# Altium PCB HandChip.PcbDoc
Units mil, origin at the board's own origin, x right, y up, seen from the top; angles counter-clockwise.
Board outline 3000 x 2000 mil, 2 copper layers (Top Layer, Bottom Layer); 39 components, 27 nets, 139 pads, 72 vias.
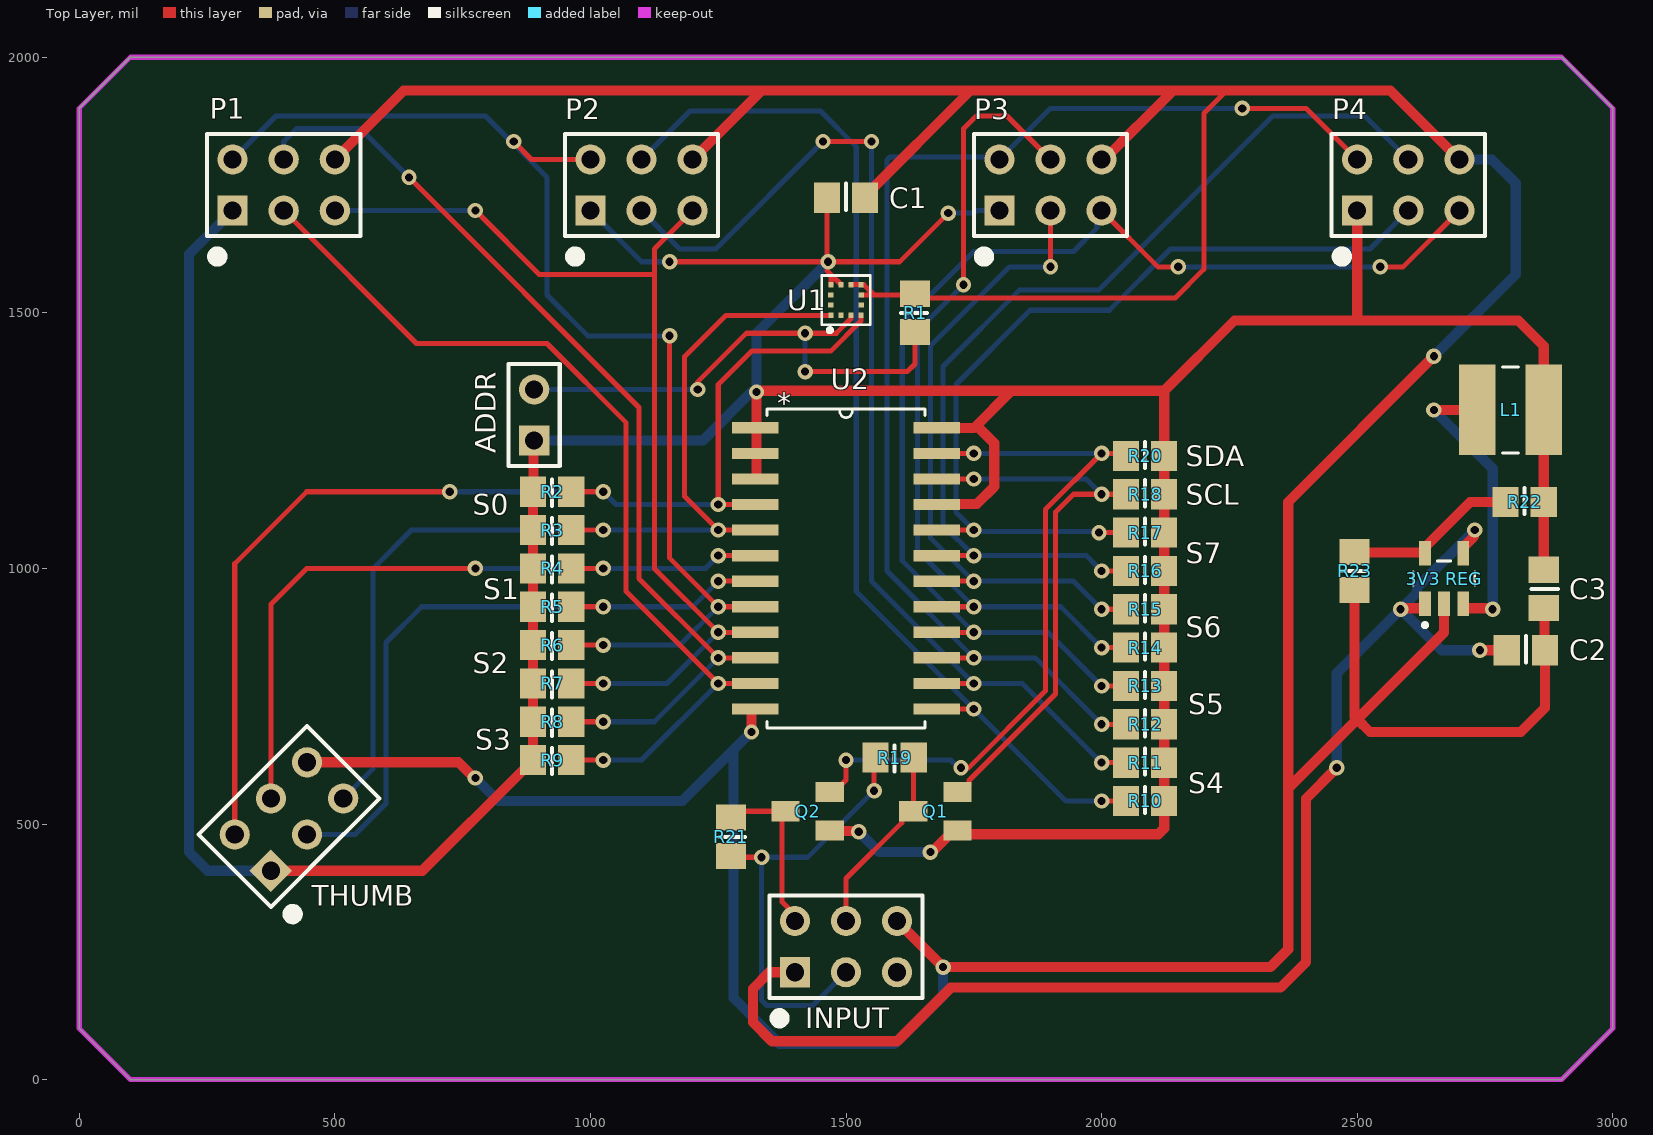
[diagram p0: Top Layer view]
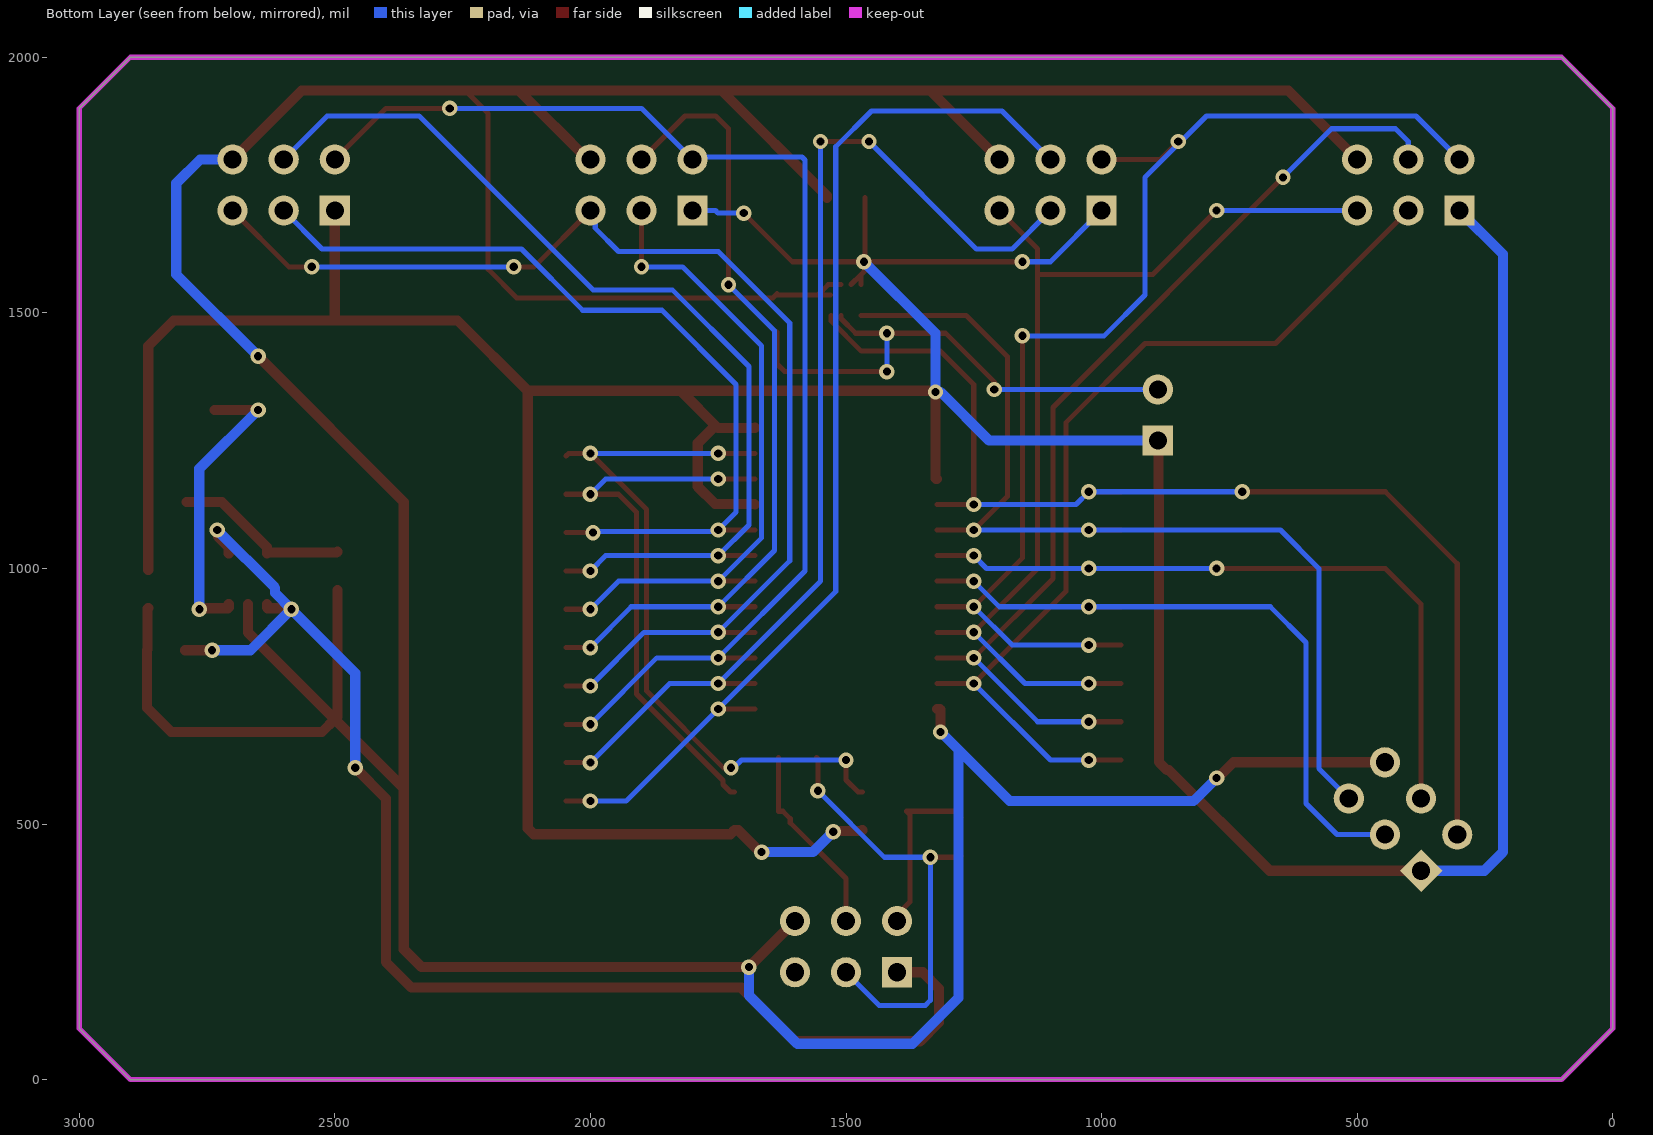
[diagram p1: Bottom Layer view, seen from below]
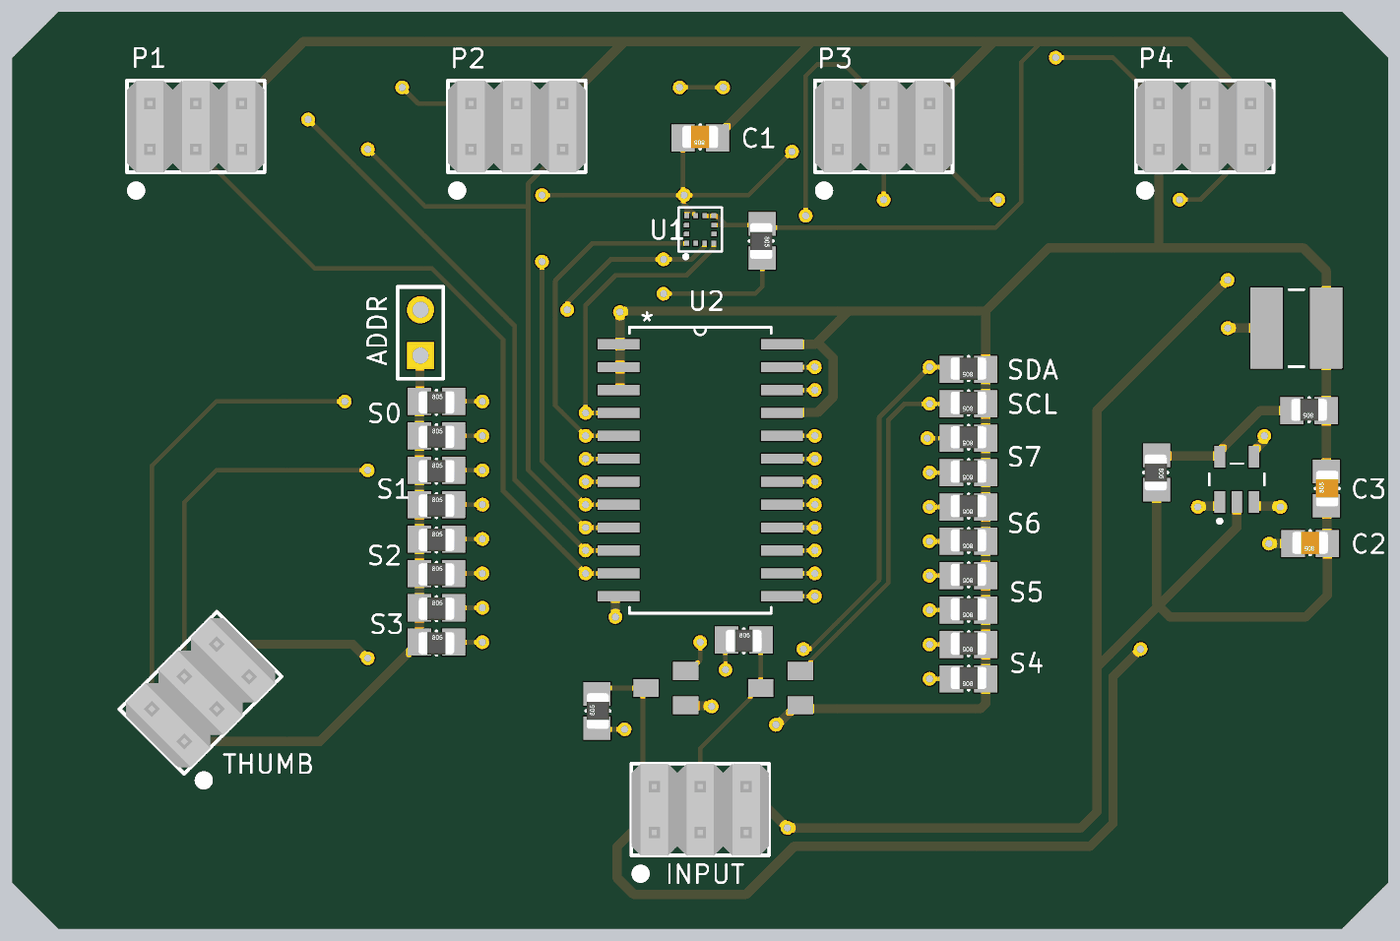
[diagram p2: 3D render of the assembled board from above, using the file's embedded part models]

## Layer stack, top to bottom
Top Solder: solder mask 0.4, Solder Resist, Dk 3.5
Top Layer: signal copper 1.4
Dielectric 1: dielectric 12.6, FR-4, Dk 4.8
Bottom Layer: signal copper 1.4
Bottom Solder: solder mask 0.4, Solder Resist, Dk 3.5

## Board outline
100,0 0,100 0,1900 100,2000 2900,2000 3000,1900 3000,100 2900,0

## Design rules (kind name [scope] priority, off if disabled: settings)
Clearance "Clearance~Sunstone Circuits" [All] p1: gap=6 ignorepadtopadclearanceinfootprint=FALSE except(0: Arc-Hole Track-Hole SMDPad-Hole THPad-Hole Via-Hole Fill-Hole Poly-Hole Region-Hole Text-Hole) // Sunstone Circuits Minimum Clearance Rule (Double Sided)
HoleSize "HoleSize~Sunstone Circuits" [All] p1: absolutevalues=TRUE maxlimit=251 minlimit=16 maxpercent=80.000 minpercent=20.000 // SSC Hole Size Rule For Single Sided & Double Sided Designs.
HoleSize Testpoint [All] p2: absolutevalues=TRUE maxlimit=100 minlimit=1 maxpercent=80.000 minpercent=20.000
HoleSize TestPointUsage [All] p3: absolutevalues=TRUE maxlimit=100 minlimit=1 maxpercent=80.000 minpercent=20.000
MinimumAnnularRing "MinimumAnnularRing~Sunstone Circuits" [All] p1: minimumring=7 // Sunstone Circuits Minimum Annular Ring (Double Sided)
MinimumSolderMaskSliver [All] p1: minsoldermaskwidth=2
PlaneClearance "PlaneClearance~Sunstone Circuits" [All] p1: clearance=12 // Sunstone Circuits Power Plane Clearance Rule (Double Sided)
PlaneConnect "PlaneConnect~Sunstone Circuits" [All] p1: planeconnectstyle=Relief reliefexpansion=10 reliefentries=4 reliefconductorwidth=8 reliefairgap=10 // Sunstone Circuits Power Plane Connect Rule (Double Sided)
PolygonConnect "PolygonConnect~Sunstone Circuits" [All] p1: connectstyle=Relief reliefconductorwidth=8 reliefentries=4 polygonreliefangle="90 Angle" airgapwidth=10 // Sunstone Circuits Polygon Connect Style (Double Sided)
RoutingVias "RoutingVias~Sunstone Circuits" [All] p1: holewidth=16 width=30 viastyle="Through Hole" minholewidth=16 minwidth=30 maxholewidth=20 maxwidth=40 // Sunstone Circuits Routing Vias Rule (Double Sided)
ShortCircuit "ShortCircuit~Sunstone Circuits" [All] p1: allowed=FALSE // Sunstone Circuits Short Circuit Rule~Do Not Allow (Double Sided)
SilkToSilkClearance [All] p1: silktosilkclearance=1
SilkToSolderMaskClearance [IsPad] p1: minsilkscreentomaskgap=3 clearancetoexposedcopper=TRUE
SolderMaskExpansion "SolderMaskExpansion~Sunstone Circuits" [All] p1: expansion=3 // Sunstone Circuits Solder Mask Expansion Rule (Double Sided)
ViasUnderSMD "ViasUnderSMD~Sunstone Circuits" [All] p1: allowed=FALSE // Sunstone Circuits Vias Under SMD~Do Not Allow (Double Sided)
Width "Width~Sunstone Circuits" [All] p1: maxlimit=100 minlimit=6 preferedwidth=10 // Sunstone Circuits Minimum Width Rule (Double Sided)
23 further rules are at their usual default settings.

## Components (designator, comment, footprint, x,y, rotation, side; value= is the part's Value field where it differs from the comment)
"3V3 REG" "TLV62568DBVR" *SOT95P280X145-5N 2670,980 r0 top
ADDR "90120-0122" HDR1X2 890,1250 r90 top
C1 ".1uF" 0805-CAP 1500,1725 r180 top
C2 "Cap" 0805-CAP 2830,840 r180 top
C3 "Cap" 0805-CAP 2865,960 r90 top
INPUT "90131-0123" HDR2X3 1400,210 r0 top
L1 "SDR0403-2R2ML" *SDR0403 2800,1310 r0 top
P1 "90131-0123" HDR2X3 300,1700 r0 top
P2 "90131-0123" HDR2X3 1000,1700 r0 top
P3 "90131-0123" HDR2X3 1800,1700 r0 top
P4 "90131-0123" HDR2X3 2500,1700 r0 top
Q1 "BSS138" *BSS138_BSS138(Primary) 1675,525 r90 top
Q2 "BSS138" *BSS138_BSS138(Primary) 1425,525 r90 top
R1 "10k" 0805-RES 1635,1500 r270 top
R2 "2.4k" 0805-RES 925,1150 r0 top
R3 "2.4k" 0805-RES 925,1075 r0 top
R4 "2.4k" 0805-RES 925,1000 r0 top
R5 "2.4k" 0805-RES 925,925 r0 top
R6 "2.4k" 0805-RES 925,850 r0 top
R7 "2.4k" 0805-RES 925,775 r0 top
R8 "2.4k" 0805-RES 925,700 r0 top
R9 "2.4k" 0805-RES 925,625 r0 top
R10 "2.4k" 0805-RES 2085,545 r180 top
R11 "2.4k" 0805-RES 2085,620 r180 top
R12 "2.4k" 0805-RES 2085,695 r180 top
R13 "2.4k" 0805-RES 2085,770 r180 top
R14 "2.4k" 0805-RES 2085,845 r180 top
R15 "2.4k" 0805-RES 2085,920 r180 top
R16 "2.4k" 0805-RES 2085,995 r180 top
R17 "2.4k" 0805-RES 2085,1070 r180 top
R18 "2.4k" 0805-RES 2085,1145 r180 top
R19 "2.4k" 0805-RES 1595,630 r0 top
R20 "2.4k" 0805-RES 2085,1220 r180 top
R21 "2.4k" 0805-RES 1275,475 r90 top
R22 "2.4k" 0805-RES 2827.6,1130 r180 top
R23 "2.4k" 0805-RES 2495,995 r270 top
THUMB "90131-0123" HDR2X3 375,408.58 r45 top
U1 "KX003-1077" *XDCR_KX003-1077 1500,1525 r90 top
U2 "PCA9548ADWR" DW24 1500,1000 r0 top

## Footprints (in the part's own frame and the unit in brackets; to place one, negate y for a bottom-side part, rotate by r counter-clockwise, add the part's x,y. Pads: shape width x height; smd on the part's side, far side on the other; paste and mask are expansions set on the pad)
0805-CAP [mm]
  rect 1.3x1.5 smd: 1(-0.95,0) 2(0.95,0)
  silkscreen extent 0,-0.7 0,0.6, body extent -1,-0.68 1,0.57, height 0.78
0805-RES [mm]
  rect 1.3x1.5 smd: 1(-0.95,0) 2(0.95,0)
  silkscreen extent 0,-0.7 0,0.6, body extent -1,-0.68 1,0.57, height 0.78
*BSS138_BSS138(Primary) [mm]
  rect 1x1.4 smd: D(0,1.1) G(-0.95,-1.1) S(0.95,-1.1)
*SDR0403 [mil]
  rect 71x177 smd: 1(-65,0) 2(65,0)
  silkscreen extent -16,-84 16,84
*SOT95P280X145-5N [mm]
  rect 0.59x1.21 smd: 1(-0.95,-1.255) 2(0,-1.255) 3(0.95,-1.255) 4(0.95,1.255) 5(-0.95,1.255)
  silkscreen extent -1.53,-2.41 1.53,0.87
*XDCR_KX003-1077 [mm]
  rect 0.275x0.25 smd: 1(-0.763,0.75) 2(-0.763,0.25) 3(-0.763,-0.25) 4(-0.763,-0.75) 7(0.763,-0.75) 8(0.763,-0.25) 9(0.763,0.25) 10(0.763,0.75)
  rect 0.25x0.275 smd: 5(-0.25,-0.763) 6(0.25,-0.763) 11(0.25,0.763) 12(-0.25,0.763)
  silkscreen extent -1.6,-1.2 1.22,1.2
DW24 [mil]
  rect 91x22 smd: 1(-178,275) 2(-178,225) 3(-178,175) 4(-178,125) 5(-178,75) 6(-178,25) 7(-178,-25) 8(-178,-75) 9(-178,-125) 10(-178,-175) 11(-178,-225) 12(-178,-275) 13(178,-275) 14(178,-225) 15(178,-175) 16(178,-125) 17(178,-75) 18(178,-25) 19(178,25) 20(178,75) 21(178,125) 22(178,175) 23(178,225) 24(178,275)
  silkscreen extent -154,-312 154,312
HDR1X2 [mm] "Connector; Header; 2 Position"
  rect 1.5x1.5 hole 0.9: 1(0,0)
  round 1.5 hole 0.9: 2(2.54,0)
  silkscreen extent -1.27,-1.27 3.81,1.27
HDR2X3 [mm] "Connector; Header; 3x2 Position"
  rect 1.5x1.5 hole 0.9: 1(0,0)
  round 1.5 hole 0.9: 2(0,2.54) 3(2.54,0) 4(2.54,2.54) 5(5.08,0) 6(5.08,2.54)
  silkscreen extent -1.27,-2.54 6.35,3.81, body extent -1.27,-1.27 6.35,3.81, height 8.42

## Part data
ADDR: "MOLEX CONN HEADER 2POS .100\" STR TIN", Manufacturer 1=Molex, Supplier Part Number 1=WM8072-ND, GFUPartNo=90120-0122, Manufacturer Part Number 1=90120-0122, Part Type=THRU, Supplier 1=Digi-Key
C1: library part Cap, "Capacitor"
C2 C3: "Capacitor"
INPUT P1 P2 P3 P4 THUMB: "MOLEX CONN HEADER 6POS 2ROW .100\" STR TIN", Manufacturer 1=Molex, Supplier Part Number 1=WM8121-ND, GFUPartNo=90131-0123, Manufacturer Part Number 1=90131-0123, Part Type=THRU, Supplier 1=Digi-Key
L1: "2.2µH Unshielded Wirewound Inductor 2.6A 47mOhm Max Nonstandard", Package="Nonstandard Bourns", Availability=Unavailable, digikey_Link=https://www.digikey.com/product-detail/en/bourns-inc/SDR0403-2R2ML/SDR0403-2R2MLCT-ND/2127089, MF=Bourns, MP=SDR0403-2R2ML, Price=None
Q1 Q2: "N-Channel 50V 220mA _Ta_ 360mW _Ta_ Surface Mount Die", Package="SOT-23 Fairchild Semiconductor", Availability=Unavailable, MF="MICROSS/On Semiconductor", MP=BSS138, Price=None, SnapEDA_Link=https://www.snapeda.com/parts/BSS138/MICROSS/On%20Semiconductor/view-part/215/?ref=snap
R1 R2 R3 R4 R5 R6 R7 R8 R9 R10 R11 R12 R13 R14 R15 R16 R17 R18 R19 R20 R21 R22 R23: library part ResBasic, "Resistor"
U1: "Accelerometer X, Y, Z Axis ±2g, 4g, 8g, 16g 3.5kHz _X,Y_, 1.8kHz _Z_ 12-LGA _2x2_", Package="VFLGA-12 Rohm Semiconductor", Digi-Key_Part_Number=KX003-1077CT-ND, Digi-Key_Purchase_URL=https://www.digikey.com/product-detail/en/rohm-semiconductor/KX003-1077/KX003-1077CT-ND/9679234?utm_source=snapeda&utm_medium=aggregator&utm_campaign=symbol, MF="Rohm Semiconductor", MP=KX003-1077, SnapEDA_Link=https://www.snapeda.com/parts/KX003-1077/Rohm/view-part/3603894/?ref=snap
U2: Manufacturer="Texas Instruments", Built_By=EMA_UL_Team, C="Copyright (C) 2015 Accelerated Designs. All rights reserved", Manufacturer_Part_Number=PCA9548ADWR, Vendor="Texas Instruments"

## Via types
v1: diameter 30, hole 16, Top Layer to Bottom Layer, 72 vias

## Nets (pads, with @x,y where several pads share a name; then routed paths per layer and width w, separated by ;. In a path a pad name is that pad's centre, name@x,y a point inside that pad or via, vN(x,y) a via of type N, cw(c..) or ccw(c..) an arc to the next point about the centre after c; other vN are vias at no path point)
3V3S: ADDR.1 C1.2 C3.2 L1.2 P1.1 P2.1 P3.1 P4.1 Q1.G Q2.G R2.1 R3.1 R4.1 R5.1 R6.1 R7.1 R8.1 R9.1 R10.1 R11.1 R12.1 R13.1 R14.1 R15.1 R16.1 R17.1 R18.1 R20.1 R22.1 THUMB.1 U1.9 U1.10 U2.1 U2.2 U2.3 U2.21 U2.24 | length 8974.6
  Top Layer w10: v1(1155,1600) v1@1462.6,1600 ; 1462.6,1582.91 1470.39,1575.12 ; C1.2 v1@1462.6,1600 ; U1.10 1470.39,1555.1 1470.39,1575.12 ; U1.9 1490.16,1555.35 1470.39,1575.12 ; v1(1700,1695) 1605,1600 v1(1465,1600) v1@1462.6,1600
  Top Layer w20: THUMB.1 671.18,408.58 868.07,605.47 872.01,605.47 887.6,621.06 R9.1 R8.1 R7.1 R6.1 R5.1 R4.1 R3.1 R2.1 888.8,1151.2 888.8,1248.8 ADDR.1 ; U2.3 1324,1175 1325,1176 v1(1325,1345) ; v1@1325,1347.4 1823.4,1347.4 ; Q2.G 1469.61,486.3 1523.7,486.3 v1(1525,485) ; v1(1665,445) 1666.91,446.91 1669.75,446.91 1710.43,487.6 Q1.G 1725.91,480 2110.69,480 2122.4,491.72 R10.1 R11.1 R12.1 R13.1 R14.1 R15.1 R16.1 R17.1 R18.1 R20.1 2122.4,1347.4 ; U2.21 1679,1126 1756,1126 1790,1160 1790,1245 1761,1274 ; U2.24 1678.5,1274.5 1750.5,1274.5 1823.4,1347.4 ; P4.1 2500,1485 ; C3.2 R22.1 L1.2 2865,1435 2815,1485 2500,1485 ; 1823.4,1347.4 2122.4,1347.4 ; 2122.4,1347.4 2260,1485 2500,1485
  Bottom Layer w10: P2.1 1100,1600 v1(1155,1600) ; v1(1700,1695) 1750.47,1695 1755.47,1700 P3.1
  Bottom Layer w20: P1.1 215,1615 215,445 251.42,408.58 THUMB.1 ; ADDR.1 1220,1250 1315,1345 v1(1325,1345) 1325,1460 v1(1465,1600) ; v1(1525,485) 1565,445 v1(1665,445)
5V: "3V3 REG.1" "3V3 REG.4" C2.2 INPUT.1 | length 2656
  Top Layer w20: INPUT.1 1350,210 1318.28,178.28 1318.28,111.72 1355,75 1600,75 1705,180 2350,180 2400,230 2400,550 v1(2460,610) ; v1(2585,920) 2586.91,921.91 2630.98,921.91 2632.6,923.53 2632.6,930.59 ; 2707.4,1029.41 2707.4,1041.61 2728.09,1062.3 2728.09,1073.09 v1(2730,1075) ; v1(2740,840) C2.2
  Bottom Layer w20: v1(2460,610) 2460,795 v1(2585,920) ; v1(2730,1075) 2616.82,961.82 2616.82,951.82 v1(2585,920) ; v1(2740,840) 2665,840 v1(2585,920)
GND: "3V3 REG.2" C1.1 C2.1 C3.1 INPUT.6 P1.6 P2.6 P3.6 P4.6 R1.1 R23.2 THUMB.6 U1.6 U1.7 U1.8 U2.12 | length 10112.4
  Top Layer w10: U1.8 U1.7 1534.82,1555.02 1555,1534.84 ; U1.6 1555,1534.84 ; 2070,1865 2072.5,1867.5 ; 2245,1935 2200,1890 2200,1585 2144,1529 1643.4,1529 R1.1 1632.44,1534.84 1555,1534.84
  Top Layer w20: THUMB.6 742.07,620.71 772.78,590 v1(775,590) ; P1.6 635,1935 1335,1935 ; P2.6 1335,1935 ; v1(1315,680) 1315,724 1316,725 U2.12 ; C1.1 1537.4,1728.94 1743.46,1935 ; INPUT.6 v1(1690,220) 2330,220 2365,255 2365,570 ; P3.6 2005,1800 2070,1865 ; 2072.5,1867.5 2140,1935 ; R23.2 2495,710 2500,705 ; v1(2650,1415) 2365,1130 2365,570 ; 2670,930.59 2670,875 2500,705 ; P4.6 2565,1935 2245,1935 2140,1935 ; C3.1 2866.2,921.4 2866.2,841.2 C2.1 2867.4,727.4 2820,680 2525,680 2500,705 ; 1335,1935 1743.46,1935 ; 1743.46,1935 2140,1935 ; 2365,570 2500,705
  Bottom Layer w20: v1(775,590) 820,545 1180,545 1280,645 ; v1(1315,680) 1280,645 ; v1(1690,220) 1690,165 1595,70 1370,70 1280,160 1280,645 ; v1(2650,1415) 2810,1575 2810,1753.28 2763.28,1800 P4.6
"Net3V3 REG_3": "3V3 REG.3" L1.1 | length 588.8
  Top Layer w20: v1(2650,1310) L1.1 ; 2707.4,930.59 2707.4,923.53 2709.02,921.91 2763.09,921.91 v1(2765,920)
  Bottom Layer w20: v1(2650,1310) 2765,1195 v1(2765,920)
"Net3V3 REG_5": "3V3 REG.5" R22.2 R23.1 | length 345.3
  Top Layer w20: R23.1 2496.5,1030.91 2631.1,1030.91 2632.6,1029.41 2632.6,1041.61 2720.98,1130 R22.2
NetADDR_2: ADDR.2 R1.2 U1.3 | length 1051.1
  Top Layer w10: v1(1210,1350) 1210,1365 1305,1460 v1(1420,1460) 1481.07,1460 1509.76,1488.7 1509.76,1494.9 U1.3 ; v1(1420,1385) 1620,1385 1635,1400 R1.2
  Bottom Layer w10: ADDR.2 v1(1210,1350) ; v1(1420,1385) v1(1420,1460)
SCL0: R3.2 THUMB.5 U1.1 U2.5 | length 2001.3
  Top Layer w10: R3.2 v1(1025,1075) ; U2.5 v1(1250,1075) 1184,1141 1184,1414 1264.98,1494.98 U1.1
  Bottom Layer w10: THUMB.5 575,608.58 575,1000 650,1075 v1(1025,1075) v1(1250,1075)
SCL1: R5.2 THUMB.3 U2.7 | length 1328.7
  Top Layer w10: R5.2 v1(1025,925) ; v1(1250,975) U2.7
  Bottom Layer w10: THUMB.3 539.29,479.29 600,540 600,855 670,925 v1(1025,925) 1200,925 v1(1250,975)
SCL2: P1.5 P2.5 R7.2 U2.9 | length 1985.6
  Top Layer w10: v1(775,1700) 900,1575 1125,1575 ; R7.2 v1(1025,775) ; P2.5 1125,1625 1125,1575 ; U2.9 v1(1250,875) 1125,1000 1125,1575
  Bottom Layer w10: P1.5 v1(775,1700) ; v1(1025,775) 1150,775 v1(1250,875)
SCL3: P1.3 R9.2 U2.11 | length 1848.2
  Top Layer w10: P1.3 660,1440 915,1440 1070,1285 1070,955 v1(1250,775) U2.11 ; R9.2 v1(1025,625)
  Bottom Layer w10: v1(1025,625) 1100,625 v1(1250,775)
SCL4: P2.3 R11.2 U2.14 | length 2144.7
  Top Layer w10: v1(1455,1835) v1(1550,1835) ; U2.14 v1(1750,775) ; v1(2000,620) R11.2
  Bottom Layer w10: P2.3 1175,1625 1245,1625 v1(1455,1835) ; v1(1550,1835) 1550,975 v1(1750,775) 1845,775 v1(2000,620)
SCL5: P3.5 P4.5 R13.2 U2.16 | length 2363
  Top Layer w10: U2.16 v1(1750,875) ; v1(2000,770) R13.2 ; P3.5 2110,1590 v1(2150,1590) ; v1(2545,1590) 2590,1590 P4.5
  Bottom Layer w10: v1(2000,770) 1895,875 v1(1750,875) 1610,1015 1610,1480 1750,1620 1945,1620 1990.61,1665.61 1990.61,1690.61 P3.5 ; v1(2150,1590) v1(2545,1590)
SCL6: P3.3 R15.2 U2.18 | length 1296.8
  Top Layer w10: U2.18 v1(1750,975) ; v1(1900,1590) P3.3 ; v1(2000,920) R15.2
  Bottom Layer w10: v1(1900,1590) 1820,1590 1665,1435 1665,1060 v1(1750,975) 1945,975 v1(2000,920)
SCL7: P4.3 R17.2 U2.20 | length 1697
  Top Layer w10: U2.20 v1(1750,1075) ; v1(1995,1070) R17.2
  Bottom Layer w10: v1(1995,1070) 1992.5,1072.5 1752.5,1072.5 v1(1750,1075) 1715,1110 1715,1360 1860,1505 2015,1505 2135,1625 2525,1625 P4.3
SCL_in: INPUT.4 Q1.D R19.2 | length 379.5
  Top Layer w10: INPUT.4 1500,393.31 1609.13,502.44 1609.13,510.31 1623.82,525 Q1.D 1631.69,629.29 R19.2
SCL_S: Q1.S R18.2 U2.22 | length 1118.1
  Top Layer w10: U2.22 v1(1750,1175) ; Q1.S 1726.18,562.4 1740.87,577.09 1740.87,584.96 1910,754.09 1910,1110 1945,1145 v1(2000,1145) R18.2
  Bottom Layer w10: v1(1750,1175) 1970,1175 v1(2000,1145)
SDA0: R2.2 THUMB.2 U1.4 U2.4 | length 2255.5
  Top Layer w10: THUMB.2 304.29,1009.29 445,1150 v1(725,1150) ; R2.2 v1(1025,1150) ; U2.4 v1(1250,1125) 1250,1360 1315,1425 1470,1425 1529.45,1484.45 1529.45,1494.9 U1.4
  Bottom Layer w10: v1(725,1150) v1(1025,1150) 1050,1125 v1(1250,1125)
SDA1: R4.2 THUMB.4 U2.6 | length 1428.9
  Top Layer w10: THUMB.4 375,930 445,1000 v1(775,1000) ; R4.2 v1(1025,1000) ; v1(1250,1025) U2.6
  Bottom Layer w10: v1(775,1000) v1(1025,1000) 1225,1000 v1(1250,1025)
SDA2: P1.2 P2.2 R6.2 U2.8 | length 2330.5
  Top Layer w10: v1(850,1835) 885,1800 P2.2 ; R6.2 v1(1025,850) ; v1(1155,1455) 1155,1020 v1(1250,925) U2.8
  Bottom Layer w10: P1.2 385,1885 794.59,1885 844.59,1835 v1(850,1835) 850,1830 915,1765 915,1535 995,1455 v1(1155,1455) ; v1(1025,850) 1175,850 v1(1250,925)
SDA3: P1.4 R8.2 U2.10 | length 1931.7
  Top Layer w10: v1(645,1765) 1095,1315 1095,980 v1(1250,825) U2.10 ; R8.2 v1(1025,700)
  Bottom Layer w10: P1.4 400,1835 425,1860 550,1860 v1(645,1765) ; v1(1025,700) 1125,700 v1(1250,825)
SDA4: P2.4 R10.2 U2.13 | length 2127.8
  Top Layer w10: U2.13 v1(1750,725) ; v1(2000,545) R10.2
  Bottom Layer w10: P2.4 1195,1895 1450,1895 1520,1825 1520,955 v1(1750,725) 1930,545 v1(2000,545)
SDA5: P3.2 P4.2 R12.2 U2.15 | length 2475.3
  Top Layer w10: U2.15 v1(1750,825) ; v1(2000,695) R12.2 ; v1(2275,1900) 2400,1900 P4.2
  Bottom Layer w10: v1(2000,695) 1870,825 v1(1750,825) 1580,995 1580,1799.14 1585.86,1805 1795,1805 P3.2 1900,1900 v1(2275,1900)
SDA6: P3.4 R14.2 U2.17 | length 1636.1
  Top Layer w10: U2.17 v1(1750,925) ; v1(1730,1555) 1730,1860 1755,1885 1815,1885 P3.4 ; v1(2000,845) R14.2
  Bottom Layer w10: v1(1730,1555) 1640,1465 1640,1035 v1(1750,925) 1920,925 v1(2000,845)
SDA7: P4.4 R16.2 U2.19 | length 1925.1
  Top Layer w10: U2.19 v1(1750,1025) ; v1(2000,995) R16.2
  Bottom Layer w10: v1(2000,995) 1970,1025 v1(1750,1025) 1690,1085 1690,1395 1840,1545 1995,1545 2335,1885 2515,1885 P4.4
SDA_in: INPUT.2 Q2.D R21.2 | length 340
  Top Layer w10: R21.2 1287.6,525 Q2.D 1375,518.31 1375,347.97 1400,322.97 INPUT.2
SDA_S: Q2.S R20.2 U2.23 | length 1420.9
  Top Layer w10: Q2.S 1476.18,562.4 1500,586.22 v1(1500,625) ; U2.23 v1(1750,1225) ; v1(1725,610) 1740,610 1890,760 1890,1115 v1(2000,1225) 2042.6,1225 R20.2
  Bottom Layer w10: v1(1500,625) 1704.59,625 1719.59,610 v1(1725,610) ; v1(1750,1225) v1(2000,1225)
VREF: INPUT.3 R19.1 R21.1 | length 877.1
  Top Layer w10: R21.1 1277.6,435 v1(1335,435) ; v1(1555,565) 1555,627.4 R19.1
  Bottom Layer w10: INPUT.3 1435,145 1345,145 1335,155 v1(1335,435) 1425,435 v1(1555,565)
pads on no net: INPUT.5 U1.2 U1.5 U1.11 U1.12

## Keep-outs
Keep-Out Layer:
  the board outline again, w10

## Silkscreen, mask and mechanical layers (free items; w line width, h text height)
Top Overlay:
  text "SDA" at 2165,1200 h40
  text "SCL" at 2165,1125 h40
  text "S0" at 770,1105 h40
  text "S7" at 2165,1010 h40
  text "S1" at 790,940 h40
  text "S6" at 2165,865 h40
  text "S2" at 770,795 h40
  text "S5" at 2170,715 h40
  text "S3" at 775,645 h40
  text "S4" at 2170,560 h40

## Text inside footprints (layer, text, board x,y; h text height)
U2: Top Overlay "*" at 1365.5,1304 h40